# Altium PCB RasPagerADF7012.PcbDoc
Units mm, origin at the board's own origin, x right, y up, seen from the top; angles counter-clockwise.
Board outline 49 x 49 mm, 2 copper layers (Top Layer, Bottom Layer); 53 components, 54 nets, 192 pads, 0 vias.
Unrouted connection lines stored in the file: 124.
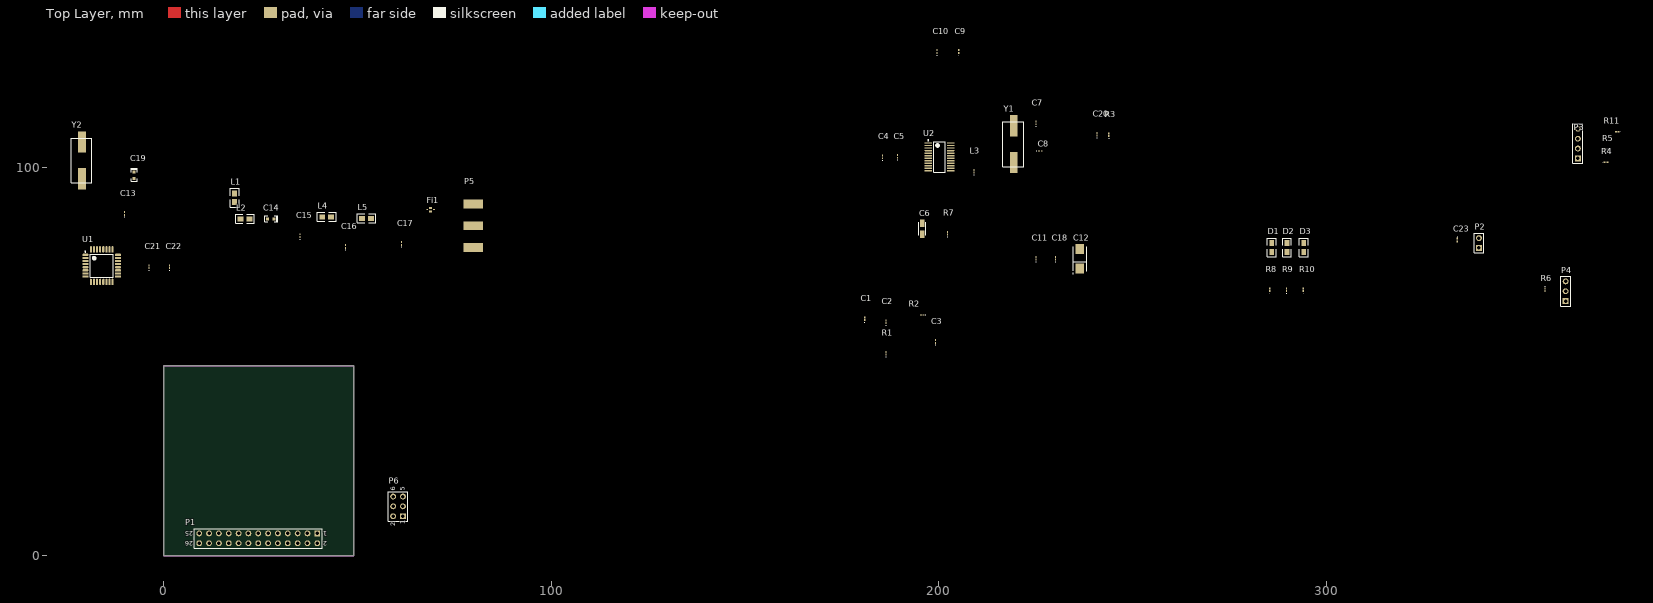
[diagram p0: Top Layer view]
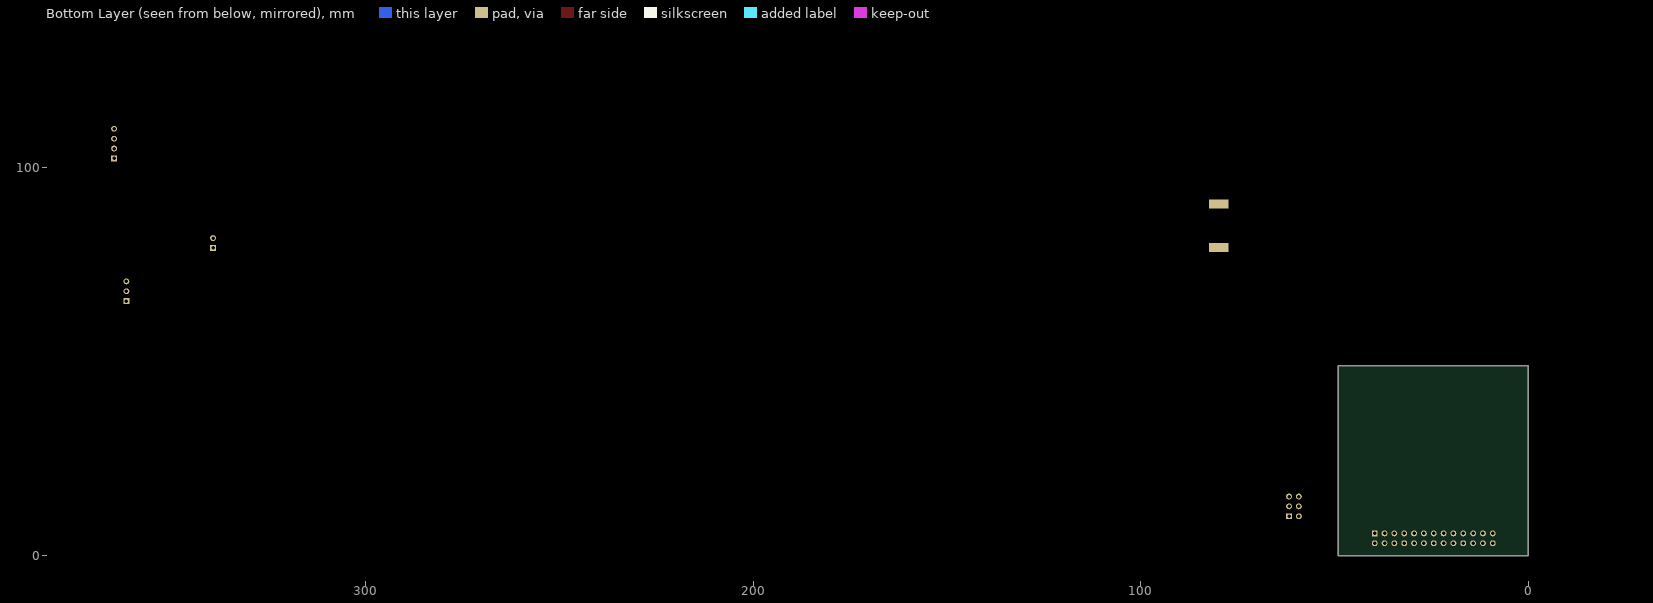
[diagram p1: Bottom Layer view, seen from below]

## Layer stack, top to bottom
Top Solder: solder mask 0.0102, Solder Resist, Dk 3.5
Top Layer: signal copper 0.0356
Dielectric 1: dielectric 0.32, FR-4, Dk 4.8
Bottom Layer: signal copper 0.0356
Bottom Solder: solder mask 0.0102, Solder Resist, Dk 3.5

## Board outline
0,0 0,49 49,49 49,0

## Design rules (kind name [scope] priority, off if disabled: settings)
Clearance [All] p1: gap=0.254
PolygonConnect [All] p1: connectstyle=Relief reliefconductorwidth=0.254 reliefentries=4 polygonreliefangle="90 Angle" airgapwidth=0.254
RoomDefinition RasPagerADF7012 [InComponentClass('RasPagerADF7012')] p1: confinementstyle=ConfineIn formatcopy=TRUE lockcomponents=FALSE outline 0,-0.127 49.276,-0.127 49.276,49 0,49
RoutingVias [All] p1: holewidth=0.711 width=1.27 viastyle="Through Hole" minholewidth=0.711 minwidth=1.27 maxholewidth=0.711 maxwidth=1.27
SolderMaskExpansion [All] p1: expansion=0.102
Width [All] p1: maxlimit=0.254 minlimit=0.254 preferedwidth=0.254
30 further rules are at their usual default settings.

## Components (designator, comment, footprint, x,y, rotation, side; value= is the part's Value field where it differs from the comment)
C1 "Cap" 0603#1 180.848,61.087 r90 top
C2 "Cap" 0603#1 186.309,60.325 r90 top
C3 "Cap" 0603#1 199.136,55.245 r90 top
C4 "Cap" 0603#1 185.42,102.87 r90 top
C5 "Cap" 0603#1 189.357,102.997 r90 top
C6 "1,0 µF" 3216 195.707,84.328 r90 top
C7 "Cap" 0603#1 225.044,111.633 r90 top
C8 "Cap" 0603#1 226.187,104.394 r0 top
C9 "Cap" 0603#1 205.105,130.048 r90 top
C10 "Cap" 0603#1 199.517,130.048 r90 top
C11 "Cap" 0603#1 225.044,76.708 r90 top
C12 "293D107X0004C2" 6032 236.347,76.581 r90 top
C13 "Cap" 0603#1 -10.16,88.265 r90 top
C14 "Cap" 0603#2 26.797,86.868 r0 top
C15 "Cap" 0603#1 35.179,82.55 r90 top
C16 "Cap" 0603#1 46.863,79.756 r90 top
C17 "Cap" 0603#1 61.341,80.518 r90 top
C18 "Cap" 0603#1 230.124,76.708 r90 top
C19 "Cap" 0603#2 -7.62,97.282 r90 top
C20 "Cap" 0603#1 240.792,108.712 r90 top
C21 "Cap" 0603#1 -3.81,74.549 r90 top
C22 "Cap" 0603#1 1.524,74.549 r90 top
C23 "Cap" 0603#1 333.756,81.407 r270 top
D1 "TOP LED rot" 0805 285.877,78.359 r90 top
D2 "TOP LED gelb" 0805 289.814,78.359 r90 top
D3 "TOP LED grün" 0805 294.132,78.359 r90 top
Fi1 "FI168L062005-T" "FI 168L062005" 68.834,89.281 r0 top
L1 "22 nH" 0805 18.288,91.186 r90 top
L2 "10 nH" 0805 19.812,86.868 r0 top
L3 "22 nH" 0603#1 209.042,99.187 r90 top
L4 "22 nH" 0805 40.894,87.376 r0 top
L5 "22 nH" 0805 51.181,86.995 r0 top
P1 "GPIO RaspberryPi" HDR2X13 39.624,5.715 r180 top
P2 "Power 5V" HDR1X2 339.344,79.375 r90 top
P3 "Front_LED" HDR1X4 364.871,102.489 r90 top
P4 "OneWire" HDR1X3 361.696,65.659 r90 top
P5 "SMA_PCB_End_Launch" SMA_END_LAUNCH_142-0701-801 79.883,85.09 r90 top
P6 "I2C" HDR2X3 61.722,10.16 r90 top
R1 "" 0603#1 186.309,52.197 r90 top
R2 "" 0603#1 195.707,62.103 r180 top
R3 "" 0603#1 243.84,108.585 r90 top
R4 "" 0603#1 372.11,101.473 r0 top
R5 "" 0603#1 372.364,104.902 r0 top
R6 "" 0603#1 356.362,68.58 r270 top
R7 "" 0603#1 202.184,83.185 r90 top
R8 "" 0603#1 285.369,68.58 r90 top
R9 "" 0603#1 289.687,68.58 r90 top
R10 "" 0603#1 294.005,68.58 r90 top
R11 "" 0603#1 375.031,109.347 r180 top
U1 "ATmega8L-8AC" 32A_N -16.002,74.803 r0 top
U2 "ADF7012BRUZ" ADI-RU-24_M 200.152,102.87 r0 top
Y1 "18,432 MHz" "HC49/4H SMX" 219.329,106.172 r0 top
Y2 "7.3728 MHz" "HC49/4H SMX" -21.082,101.981 r0 top

## Footprints (in the part's own frame and the unit in brackets; to place one, negate y for a bottom-side part, rotate by r counter-clockwise, add the part's x,y. Pads: shape width x height; smd on the part's side, far side on the other; paste and mask are expansions set on the pad)
32A_N [mm] "Thin QFP, 32-Leads, Body 7x7mm, Pitch 0.8mm, IPC Medium Density"
  oval 1.65x0.55 smd: 1(-4.2,2.8) 2(-4.2,2) 3(-4.2,1.2) 4(-4.2,0.4) 5(-4.2,-0.4) 6(-4.2,-1.2) 7(-4.2,-2) 8(-4.2,-2.8) 17(4.2,-2.8) 18(4.2,-2) 19(4.2,-1.2) 20(4.2,-0.4) 21(4.2,0.4) 22(4.2,1.2) 23(4.2,2) 24(4.2,2.8)
  oval 0.55x1.65 smd: 9(-2.8,-4.2) 10(-2,-4.2) 11(-1.2,-4.2) 12(-0.4,-4.2) 13(0.4,-4.2) 14(1.2,-4.2) 15(2,-4.2) 16(2.8,-4.2) 25(2.8,4.2) 26(2,4.2) 27(1.2,4.2) 28(0.4,4.2) 29(-0.4,4.2) 30(-1.2,4.2) 31(-2,4.2) 32(-2.8,4.2)
  silkscreen extent -4.32,-2.95 2.95,3.75, body extent -3.5,-3.5 3.5,3.5, height 1.2
0603#1 [mm] "Chip Inductor, Body 0.6x0.3mm, IPC High Density"
  rect 0.5x0.3 smd: 1(-0.35,0) 2(0.35,0)
  silkscreen extent -0.9,-0.05 -0.9,0.05, body extent -0.33,-0.18 0.33,0.18, height 0.55
0603#2 [mm]
  rect 0.762x0.762 smd: 1(0,0) 2(1.651,0)
  silkscreen extent -0.76,-0.76 2.67,0.76
0805 [mil]
  rect 60x50 smd: 1(0,0) 2(90,0)
  silkscreen extent -50,-45 140,45
3216 [mm] "Capacitor, SM Tantalum; Body 3.2 x 1.6 mm (LxW typ)"
  rect 2x1.2 smd: 1(-1.4,0) 2(1.4,0)
  silkscreen extent -1.7,-0.9 1.7,0.9
6032 [mm] "Capacitor, SM Tantalum; Body 6.0 x 3.2 mm (LxW typ)"
  rect 2.6x2.2 smd: 1(-2.5,0) 2(2.5,0)
  silkscreen extent -3.92,-1.75 3.15,1.87
ADI-RU-24_M [mm] "TSOP, 24-Leads, Body 7.8x4.4mm, Pitch 0.65mm, IPC Low Density"
  oval 2x0.35 smd: 1(-2.9,3.575) 2(-2.9,2.925) 3(-2.9,2.275) 4(-2.9,1.625) 5(-2.9,0.975) 6(-2.9,0.325) 7(-2.9,-0.325) 8(-2.9,-0.975) 9(-2.9,-1.625) 10(-2.9,-2.275) 11(-2.9,-2.925) 12(-2.9,-3.575) 13(2.9,-3.575) 14(2.9,-2.925) 15(2.9,-2.275) 16(2.9,-1.625) 17(2.9,-0.975) 18(2.9,-0.325) 19(2.9,0.325) 20(2.9,0.975) 21(2.9,1.625) 22(2.9,2.275) 23(2.9,2.925) 24(2.9,3.575)
  silkscreen extent -3.02,-3.95 1.5,4.42, body extent -2.25,-3.95 2.25,3.95, height 1.2
"FI 168L062005" [mm] "Band Pass Filter"
  rect 0.5x0.3 smd: 1(0.85,0) 2(-0.85,0)
  rect 0.8x0.5 smd: 3(0,-0.45) 4(0,0.45)
"HC49/4H SMX" [mm]
  rect 2x5.5 smd: 1(0,-4.75) 2(0,4.75)
  silkscreen extent -2.79,-5.84 2.54,5.71
HDR1X2 [mm] "Connector; Header; 2 Position"
  rect 1.5x1.5 hole 0.9: 1(0,0)
  round 1.5 hole 0.9: 2(2.54,0)
  silkscreen extent -1.27,-1.27 3.81,1.27
HDR1X3 [mm] "Connector; Header; 3 Position"
  rect 1.5x1.5 hole 0.9: 1(0,0)
  round 1.5 hole 0.9: 2(2.54,0) 3(5.08,0)
  silkscreen extent -1.27,-1.27 6.35,1.27
HDR1X4 [mm] "Connector; Header; 4 Position"
  rect 1.5x1.5 hole 0.9: 1(0,0)
  round 1.5 hole 0.9: 2(2.54,0) 3(5.08,0) 4(7.62,0)
  silkscreen extent -1.27,-1.27 8.89,1.27
HDR2X3 [mm] "Connector; Header; 3x2 Position"
  rect 1.5x1.5 hole 0.9: 1(0,0)
  round 1.5 hole 0.9: 2(0,2.54) 3(2.54,0) 4(2.54,2.54) 5(5.08,0) 6(5.08,2.54)
  silkscreen extent -1.27,-1.27 6.35,3.81
HDR2X13 [mm] "Connector; Header; 13x2 Position"
  rect 1.5x1.5 hole 0.9: 1(0,0)
  round 1.5 hole 0.9: 2(0,2.54) 3(2.54,0) 4(2.54,2.54) 5(5.08,0) 6(5.08,2.54) 7(7.62,0) 8(7.62,2.54) 9(10.16,0) 10(10.16,2.54) 11(12.7,0) 12(12.7,2.54) 13(15.24,0) 14(15.24,2.54) 15(17.78,0) 16(17.78,2.54) 17(20.32,0) 18(20.32,2.54) 19(22.86,0) 20(22.86,2.54) 21(25.4,0) 22(25.4,2.54) 23(27.94,0) 24(27.94,2.54) 25(30.48,0) 26(30.48,2.54)
  silkscreen extent -1.27,-1.27 31.75,3.81
SMA_END_LAUNCH_142-0701-801 [mil]
  rect 90x200 smd: 1(0,0)
  rect 90x200 all layers, no hole: 2(-220,0) 2(220,0)

## Part data
C1 C2 C3 C4 C5 C7 C8 C9 C10 C11 C13 C14 C15 C16 C17 C18 C19 C20 C21 C22 C23: "Capacitor"
C6: library part 293D106X0004A2, "Tantamount Commercial, Surface Mount Solid Tantalum Chip Capacitor: 1,0uF, 20% Tolerance, 4 WVDC @ +85°C, Surge = 5.2V"
C12: "Tantamount Commercial, Surface Mount Solid Tantalum Chip Capacitor:10uF, 20% Tolerance, 4 WVDC @ +85°C, Surge = 5.2V"
D1 D2 D3: library part LED_2
L1 L2 L3 L4 L5: library part INDUCTOR
P1: library part "Header 13X2", "Header, 13-Pin, Dual row"
P2: library part "Header 2", "Header, 2-Pin"
P3: library part "Header 4", "Header, 4-Pin"
P4: library part "Header 3", "Header, 3-Pin"
P6: library part "Header 3X2", "Header, 3-Pin, Dual row"
R1 R2 R3 R4 R5 R6 R7 R8 R9 R10 R11: library part Res2, "Resistor"
U1: "8-Bit AVR Microcontroller with 8K Bytes of In-System Programmable Flash Memory"
U2: "Multichannel ISM Band FSK/GFSK/OOK/GOOK/ASK Transmitter, 75-1000 MHz Output Frequency, 179.2Kbps Maximum Data Rate, RU-24, Pb-Free, 62 Tube"
Y1 Y2: library part XTAL, "Crystal Oscillator"

## Nets (pads, with @x,y where several pads share a name; then routed paths per layer and width w, separated by ;. In a path a pad name is that pad's centre, name@x,y a point inside that pad or via, vN(x,y) a via of type N, cw(c..) or ccw(c..) an arc to the next point about the centre after c; other vN are vias at no path point)
5V: C23.2 P1.2 P1.4 P2.1
ADF_CE: U2.14
ADF_CLK: U2.11
ADF_CLKOUT: U2.10
ADF_DATA: U2.12
ADF_LE: U2.13
ADF_MUXOUT: U2.6
ADF_TXCLK: U1.32 U2.5
ADF_TXDATA: U1.1 U2.4
CPOUT: C1.2 C2.2 R2.2 U2.3
GND: C1.1 C3.1 C4.2 C5.2 C6.2 C7.1 C8.1 C9.1 C11.2 C12.2 C13.1 C15.1 C16.1 C17.1 C18.2 C19.1 C20.1 C21.1 C22.1 C23.1 Fi1.3 Fi1.4 P1.6 P1.9 P1.14 P1.20 P1.25 P2.2 P3.4 P4.3 P5.2 P6.5 R1.1 R7.1 R8.1 R9.1 R10.1 U1.3 U1.5 U1.21 U2.7 U2.19 U2.22
"GPIO_A(FORMER 15)": P6.4
"GPIO_B(FORMER 18)": P6.6
I2C_SCL: P1.5 P6.2
I2C_SDA: P1.3 P6.1
LED_GELB: D2.1 U1.13
LED_GRüN: D3.1 U1.14
LED_MASTER_CONN: P1.26 R4.1
LED_SW_ACTIVE: P1.24 R5.2
LED_TX_ON: D1.1 P1.22 R11.2 U1.12
MISO: P1.21 U1.16
MOSI: P1.19 U1.15
NetC2_1: C2.1 R1.2
NetC3_2: C3.2 R2.1 U2.18
NetC6_1: C6.1 U2.2
NetC7_2: C7.2 U2.9 Y1.2
NetC8_2: C8.2 U2.8 Y1.1
NetC9_2: C9.2 C10.1 U2.24
NetC10_2: C10.2 U2.17
NetC13_2: C13.2 U1.8 Y2.2
NetC14_1: C14.1 L2.2
NetC14_2: C14.2 C15.2 L4.1
NetC16_2: C16.2 L4.2 L5.1
NetC17_2: C17.2 Fi1.1 L5.2
NetC19_2: C19.2 U1.7 Y2.1
NetD1_2: D1.2 R8.2
NetD2_2: D2.2 R9.2
NetD3_2: D3.2 R10.2
NetFi1_2: Fi1.2 P5.1
NetL1_1: L1.1 L2.1 U2.20
NetL3_1: L3.1 U2.15
NetL3_2: L3.2 U2.16
NetP3_1: P3.1 R4.2
NetP3_2: P3.2 R5.1
NetP3_3: P3.3 R11.1
NetR7_2: R7.2 U2.23
ONEWIRE: P1.12 P4.2 R6.1
PTT_RASPI: P1.13 U1.24
RST: C20.2 P1.11 R3.1 U1.29
RX_UART: P1.8 U1.30
SCLK: P1.23 U1.17
SENDDATA: P1.15 U1.23
TX_UART: P1.10 U1.31
VCC: C4.1 C5.1 C11.1 C12.1 C18.1 C21.2 C22.2 L1.2 P1.1 P4.1 P6.3 R3.2 R6.2 U1.4 U1.6 U1.18 U1.20 U2.1 U2.21
pads on no net: P1.7 P1.16 P1.17 P1.18 U1.2 U1.9 U1.10 U1.11 U1.19 U1.22 U1.25 U1.26 U1.27 U1.28

## Keep-outs
Keep-Out Layer:
  the board outline again, w0.254

## Text inside footprints (layer, text, board x,y; h text height)
P1: Top Overlay "2" at 42.164,3.683 h1.27 r180; Top Overlay "1" at 42.164,6.223 h1.27 r180; Top Overlay "25" at 7.62,6.223 h1.27 r180; Top Overlay "26" at 7.62,3.683 h1.27 r180
P6: Top Overlay "1" at 62.23,8.128 h1.27 r90; Top Overlay "2" at 59.69,7.62 h1.27 r90; Top Overlay "5" at 62.23,16.764 h1.27 r90; Top Overlay "6" at 59.69,16.764 h1.27 r90